# Altium PCB DoubleBar.PcbDoc
Units mil, origin at the board's own origin, x right, y up, seen from the top; angles counter-clockwise.
Board outline 2125.98 x 1181.1 mil, 2 copper layers (Top Layer, Bottom Layer); 60 components, 43 nets, 258 pads, 23 vias.
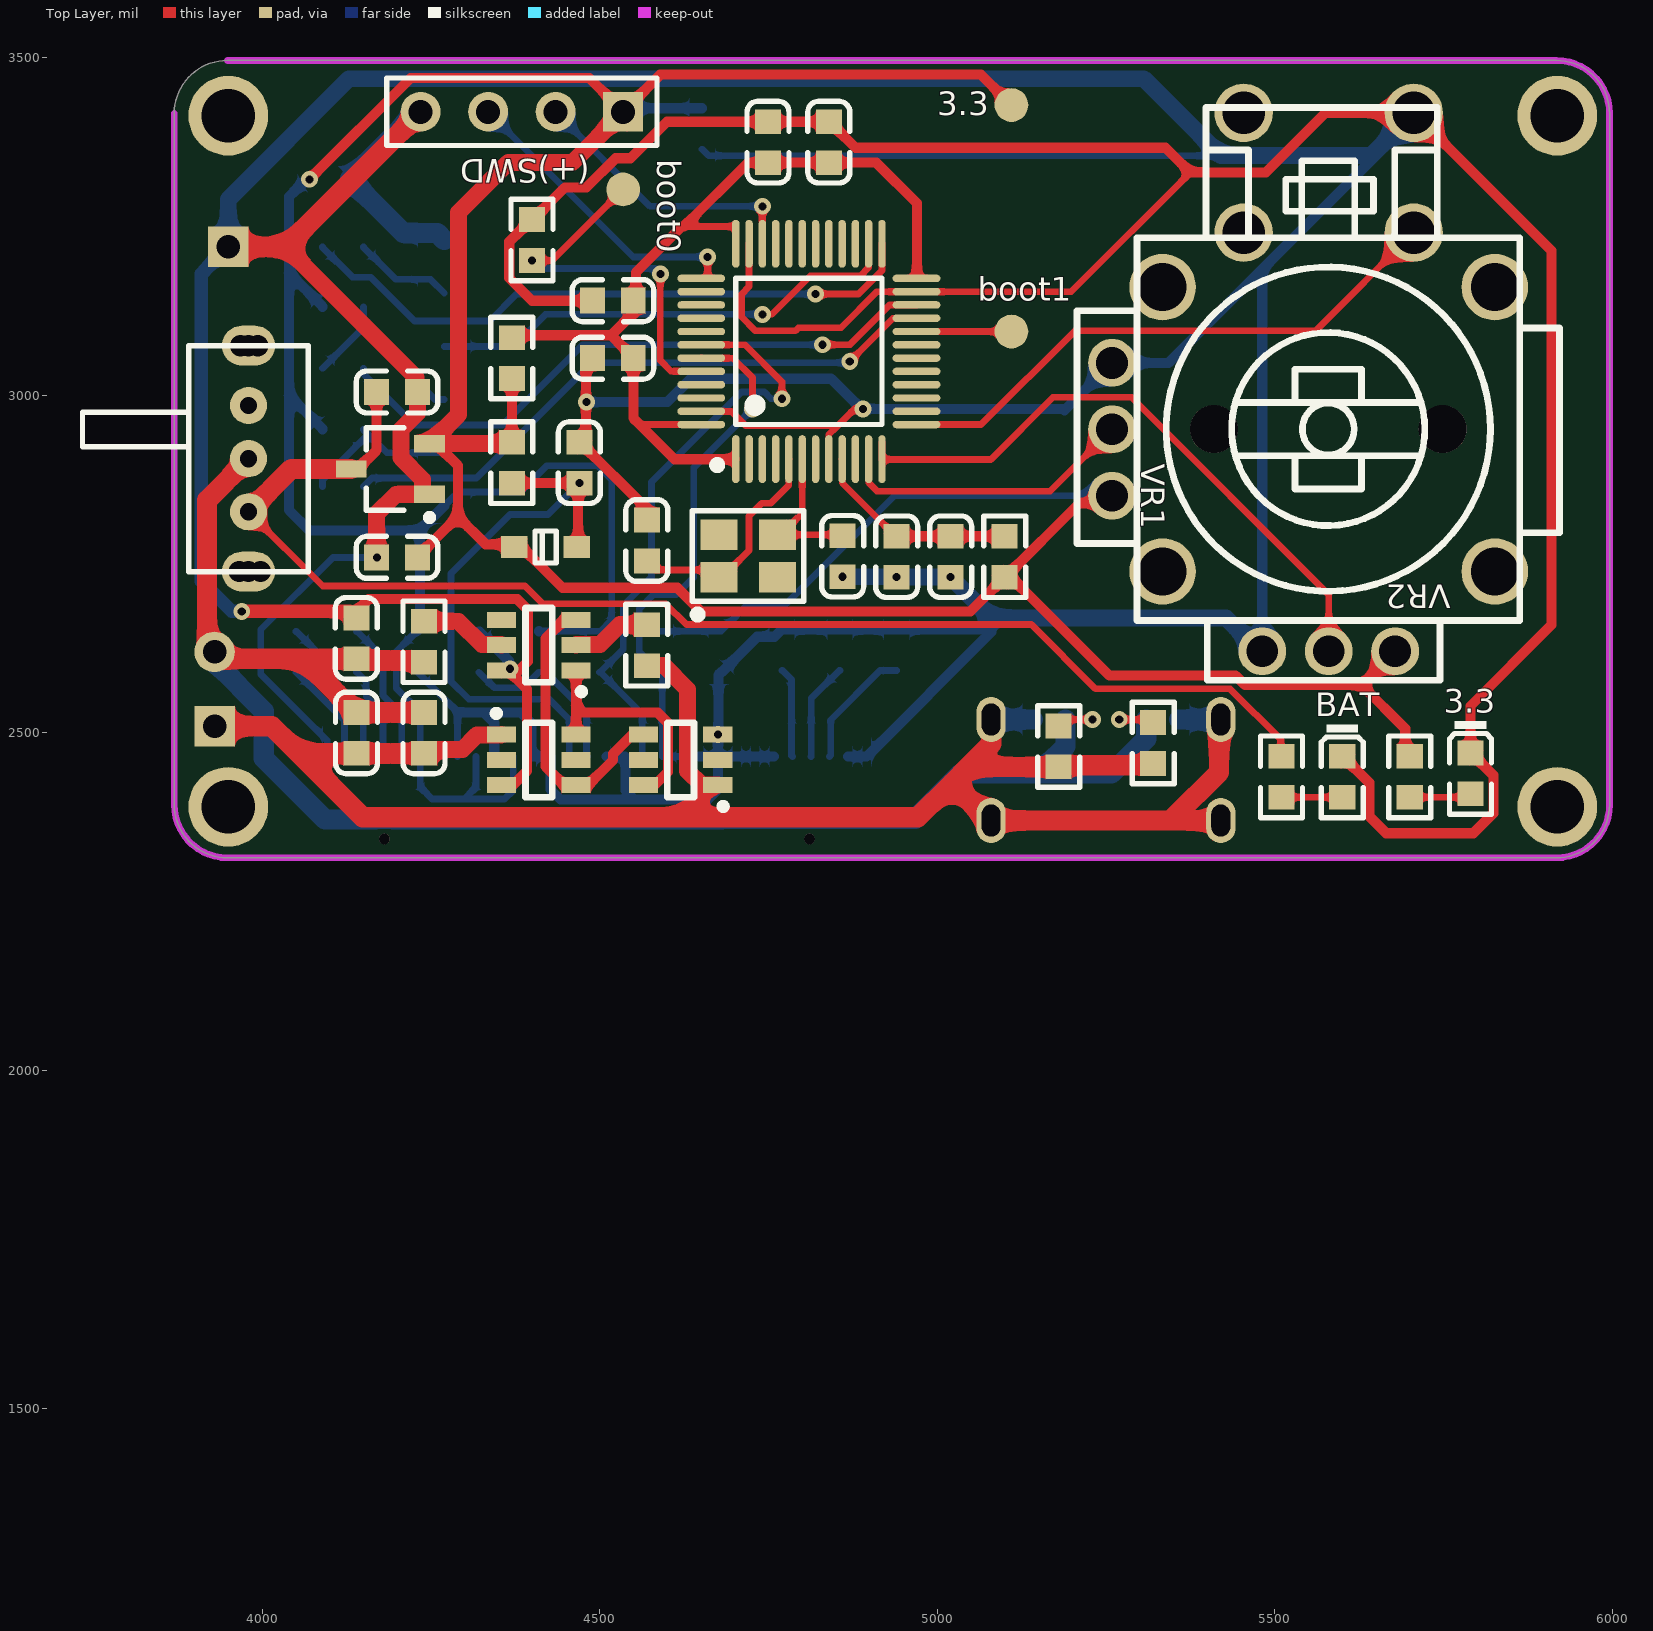
[diagram p0: Top Layer view]
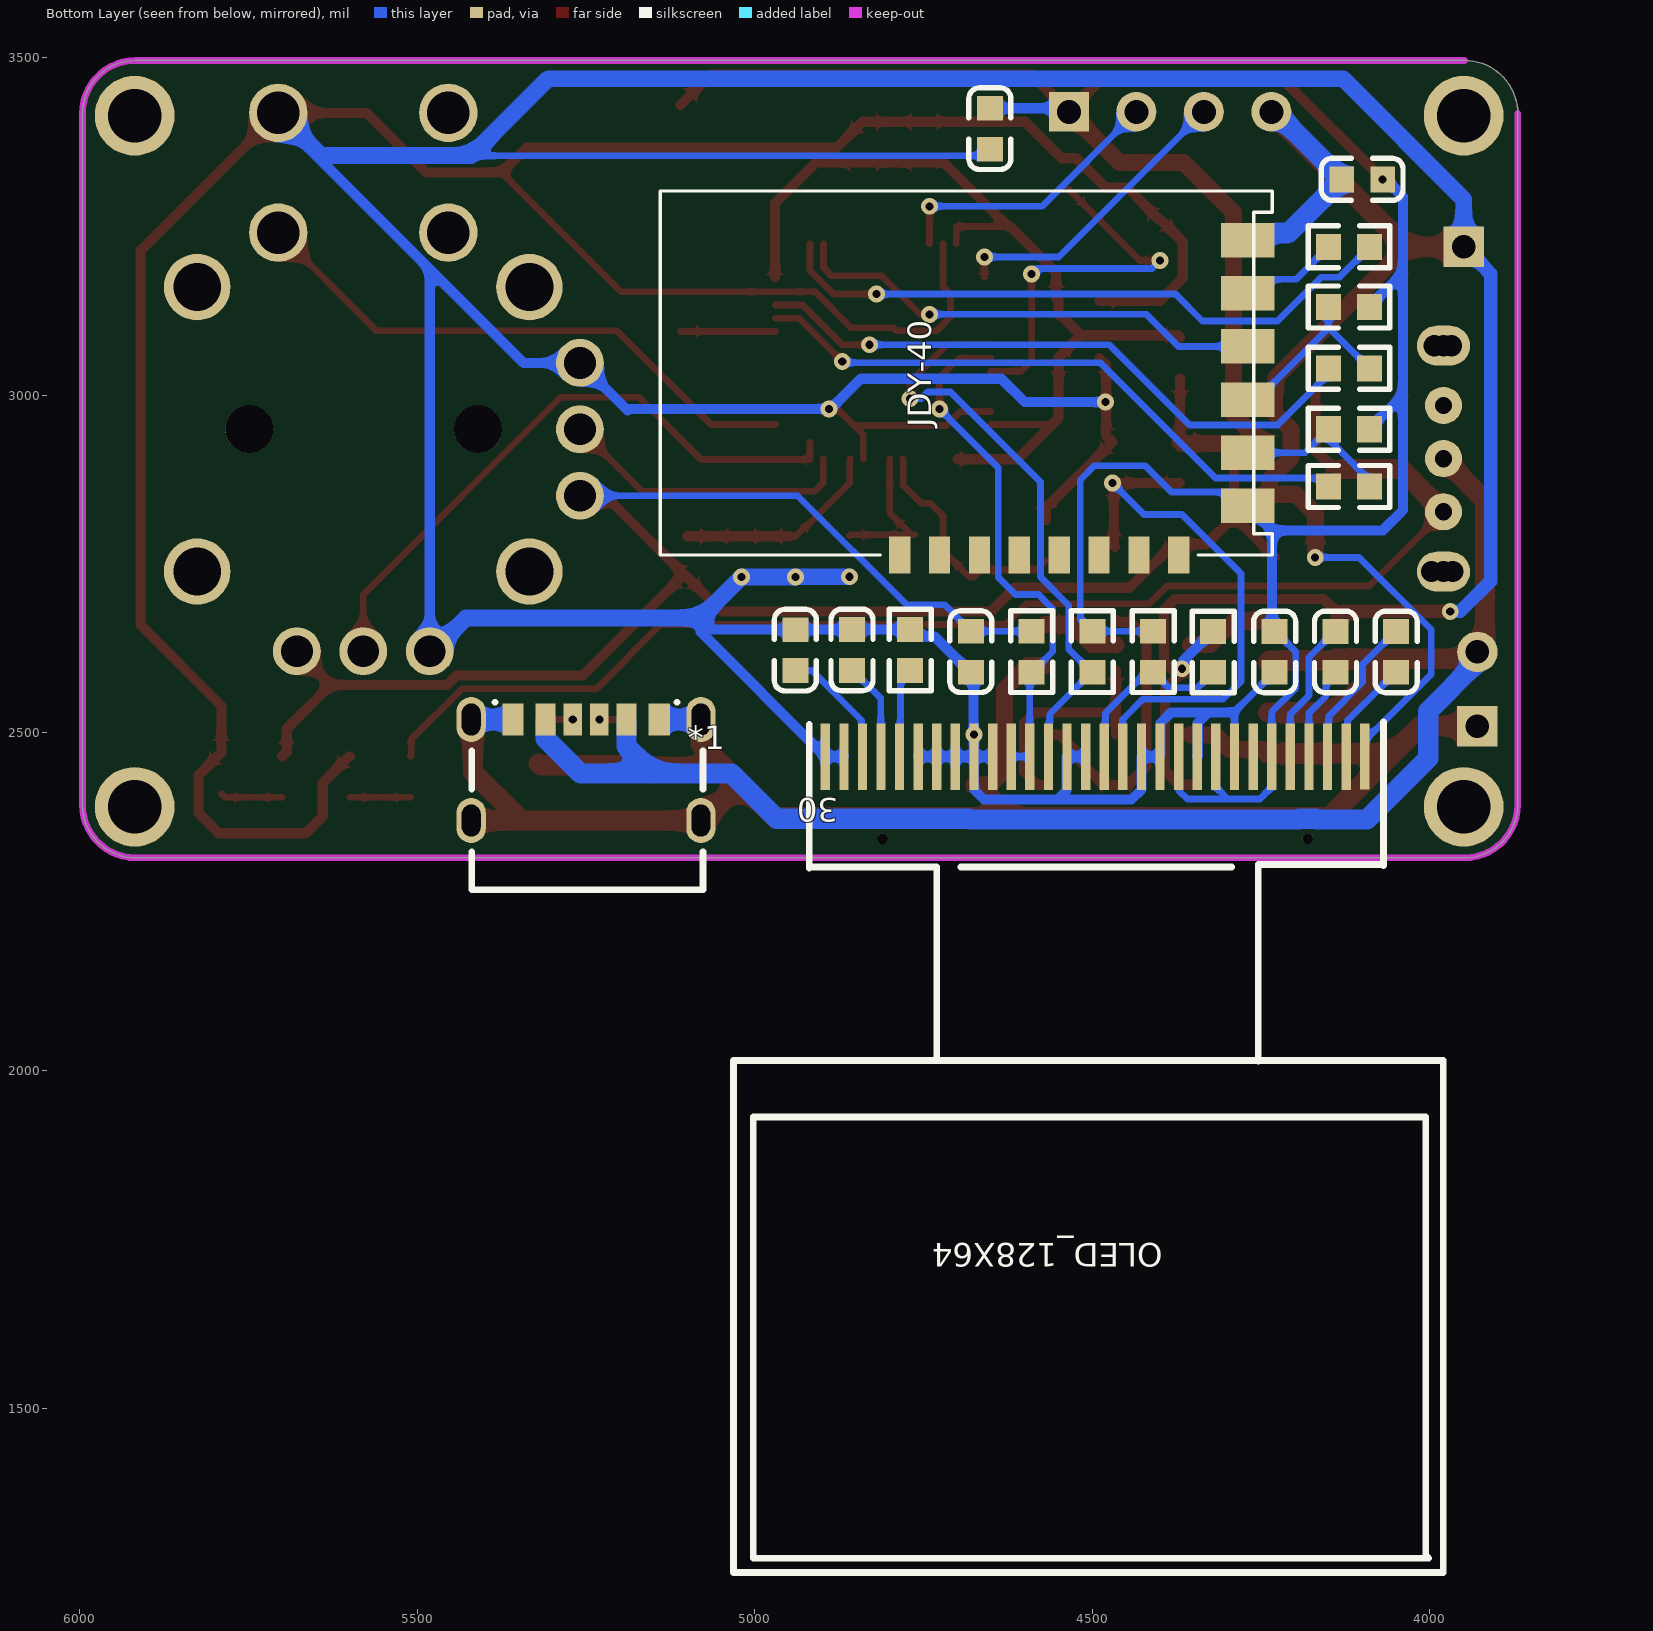
[diagram p1: Bottom Layer view, seen from below]
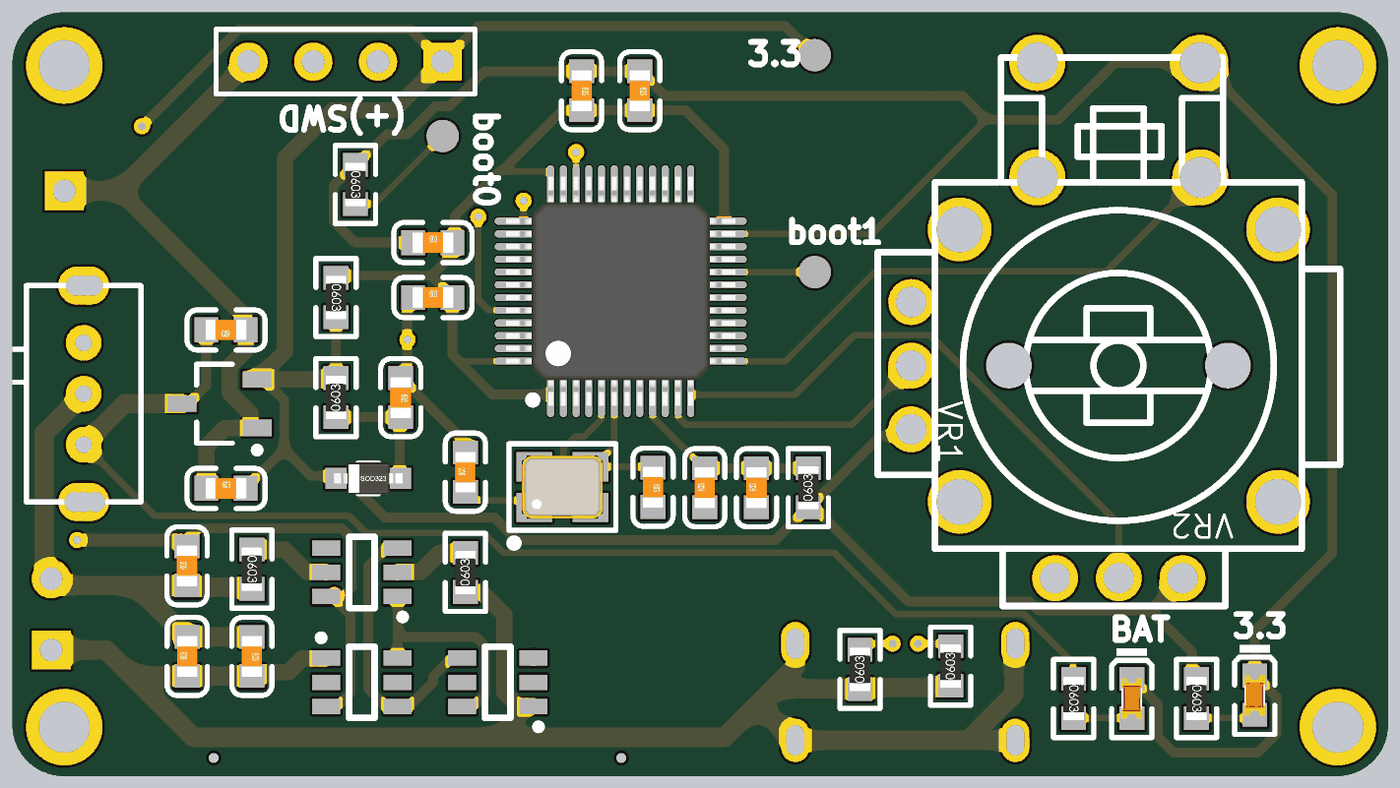
[diagram p2: 3D render of the assembled board from above, using the file's embedded part models]
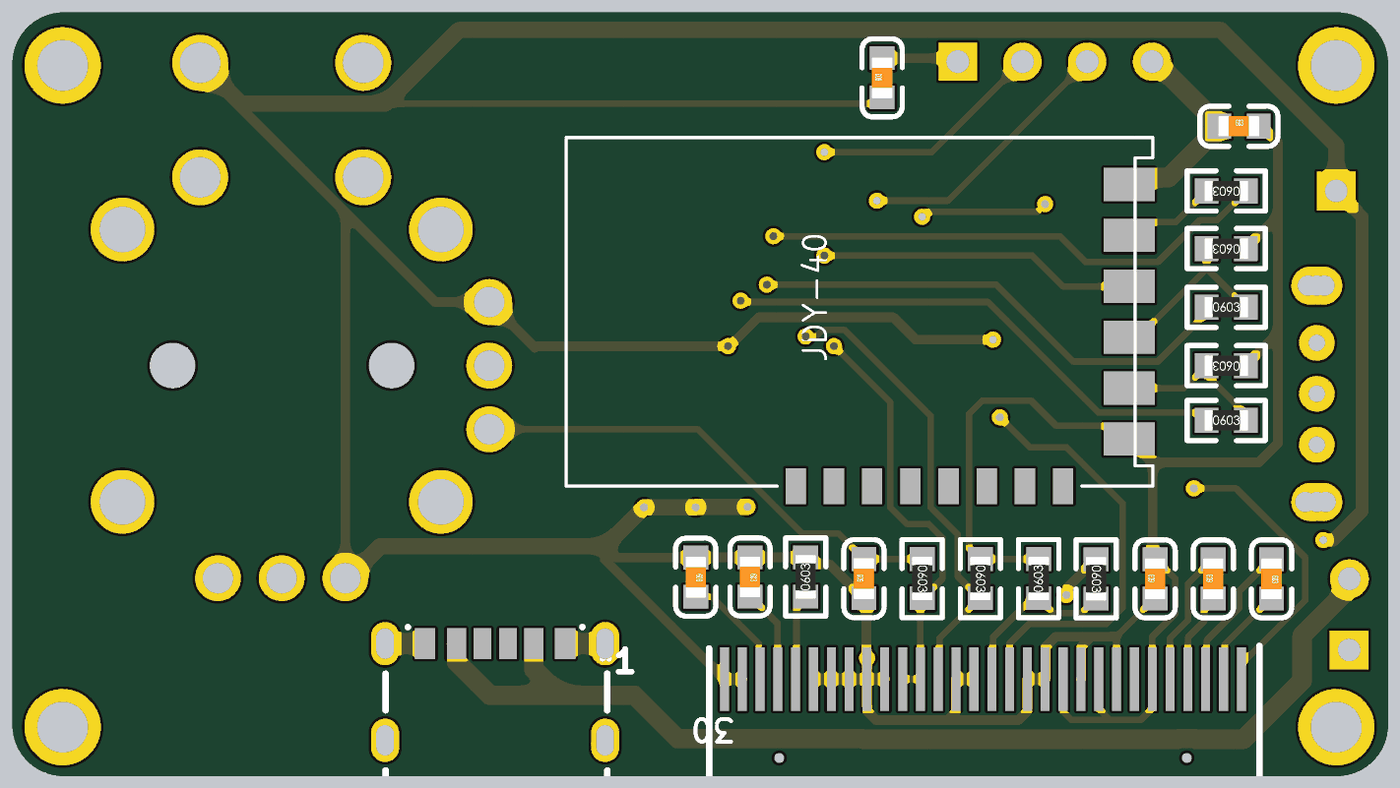
[diagram p3: 3D render of the assembled board from below, using the file's embedded part models]

## Layer stack, top to bottom
Top Solder: solder mask 0.4, Solder Resist, Dk 3.5
Top Layer: signal copper 1.4
Dielectric 1: dielectric 12.6, FR-4, Dk 4.8
Bottom Layer: signal copper 1.4
Bottom Solder: solder mask 0.4, Solder Resist, Dk 3.5

## Board outline
3870,2393.74 3870,3417.36 cw(c3948.74,3417.36) 3948.74,3496.1 5917.24,3496.1 cw(c5917.24,3417.36) 5995.98,3417.36 5995.98,2393.74 cw(c5917.24,2393.74) 5917.24,2315 3948.74,2315 cw(c3948.74,2393.74)

## Design rules (kind name [scope] priority, off if disabled: settings)
Clearance [All] p1: gap=7 ignorepadtopadclearanceinfootprint=FALSE
MinimumSolderMaskSliver [All] p1: minsoldermaskwidth=0
PolygonConnect [All] p1: connectstyle=Relief reliefconductorwidth=10 reliefentries=4 polygonreliefangle="90 Angle" airgapwidth=10
RoutingVias [All] p1: holewidth=12 width=25 viastyle="Through Hole" minholewidth=12 minwidth=25 maxholewidth=25 maxwidth=50
SilkToSilkClearance [All] p1: silktosilkclearance=0
SilkToSolderMaskClearance [IsPad] p1: minsilkscreentomaskgap=0 clearancetoexposedcopper=TRUE
SolderMaskExpansion [All] p1: expansion=4
Width [All] p1: maxlimit=100 minlimit=7 preferedwidth=10
27 further rules are at their usual default settings.

## Classes and differential pairs
component class DIY_Watch_Hardware: *1

## Components (designator, comment, footprint, x,y, rotation, side; value= is the part's Value field where it differs from the comment)
3.3 "TestPoint" TestPoint 5110,3430 r180 top (schematic designator TP4)
3.3 "红灯 0603" LC-0603_LED_S1 5790,2440 r270 top (schematic designator D2)
(+)SWD "Header 4" HDR1X4 4534.88,3420 r180 top (schematic designator SWD)
*1 "OLED_30Pin" OLED_0.96-30P-P0.70-12864 4495.98,2464.99 r0 bottom
BAT "红灯 0603" LC-0603_LED_S1 5600,2435 r270 top (schematic designator D3)
boot0 "TestPoint" TestPoint 4534.88,3305 r90 top (schematic designator TP1)
boot1 "TestPoint" TestPoint 5110,3094.53 r90 top (schematic designator TP7)
C2 "1uF/0603/50V" LC-0603_C 4050,2620 r270 bottom
C3 "1uF/0603/50V" LC-0603_C 4140,2620 r90 bottom
C4 "22pF/0603/50V" LC-0603_C 4570,2785 r90 top
C5 "22pF/0603/50V" LC-0603_C 4860,2761.65 r270 top
C6 "100nF/0603/50V" LC-0603_C 4519.69,3055.16 r0 top
C7 "100nF/0603/50V" LC-0603_C 4749.53,3375 r270 top
C8 "100nF/0603/50V" LC-0603_C 4519.69,3140.16 r0 top
C9 "100nF/0603/50V" LC-0603_C 4839.53,3375 r270 top
C10 "2.2uF/0603/16V" LC-0603_C 4940,2622.6 r270 bottom
C11 "4.7uF/0603/16V" LC-0603_C 4856.06,2622.91 r270 bottom
C12 "100nF/0603/50V" LC-0603_C 5020,2760.98 r90 top
C13 "1uF/0603/50V" LC-0603_C 4940,2760.98 r90 top
C14 "100nF/0603/50V" LC-0603_C 4139.69,2640 r90 top
C15 "1uF/0603/50V" LC-0603_C 4200,3005 r180 top
C16 "1uF/0603/50V" LC-0603_C 4200,2760 r0 top
C17 "10uF/0603/10V" LC-0603_C 4470,2900.32 r270 top
C18 "1uF/0603/50V" LC-0603_C 4680,2620.32 r90 bottom
C19 "1uF/0603/50V" LC-0603_C 4230,2620 r90 bottom
C20 "100nF/0603/50V" LC-0603_C 4100.43,3320 r180 bottom
C21 "100nF/0603/50V" LC-0603_C 4240,2500 r270 top
C22 "1uF/0603/50V" LC-0603_C 4140,2500 r90 top
C23 "104" LC-0603_C 4651.81,3395 r90 bottom
CiZhu1 "600R/0603/5%" 0603_R 5100,2760.98 r90 top value=?
D1 "1N4148WS T4" LC-SOD-323 4420,2775.32 r0 top
R1 "5.1kΩ/0603/1%" LC-0603_R 5320,2485 r90 top
R2 "10KΩ/0603/1%" LC-0603_R 4400,3230 r270 top
R3 "4.7KΩ/0603/1%" LC-0603_R 4410,2620.31 r90 bottom
R4 "4.7KΩ/0603/1%" LC-0603_R 4321.1,2620 r270 bottom
R5 "4.7KΩ/0603/1%" LC-0603_R 4500,2620.32 r270 bottom
R6 "4.7KΩ/0603/1%" LC-0603_R 4590,2620.32 r270 bottom
R7 "0Ω/0603/1%" LC-0603_R 4370,3055.16 r270 top
R8 "1KΩ/0603/1%" LC-0603_R 4570,2630 r90 top
R9 "100Ω/0603/1%" LC-0603_R 4240,2635 r270 top
R10 "5.1kΩ/0603/1%" LC-0603_R 5180,2480 r90 top
R11 "4.7KΩ/0603/1%" LC-0603_R 4120,2949.74 r0 bottom
R13 "4.7KΩ/0603/1%" LC-0603_R 4120,3130.87 r0 bottom
R14 "4.7KΩ/0603/1%" LC-0603_R 4370,2900.32 r90 top
R15 "100Ω/0603/1%" LC-0603_R 4120,2865 r180 bottom
R16 "100Ω/0603/1%" LC-0603_R 4120,3040 r180 bottom
R17 "100Ω/0603/1%" LC-0603_R 4120,3220 r0 bottom
R18 "1MΩ/0603/1%" LC-0603_R 4770,2622.91 r90 bottom
R19 "1KΩ/0603/1%" LC-0603_R 5700,2435 r270 top
R20 "1KΩ/0603/1%" LC-0603_R 5510,2435 r270 top
S "SW-SPDT" 8.5*3.5_3P 3981.97,2906.26 r270 top
SW1 "RKJXV1224005" RKJXV1224005 5579.94,2949.74 r180 top
U1 "STM32F103C8T6" LQFP-48_7x7x05P 4810,3065 r0 top
U2 "DW01KA" SOT-23-6 4410,2630 r0 top
U3 "SC8205C" SOT-23-6 4410,2460 r180 top
U4 "SC8205C" SOT-23-6 4620,2460 r0 top
U5 "SC662K-3.3V" SOT-23-3L 4190,2890.98 r0 top
USB1 "TYPE-C 6P" TYPE-C-SMD_TYPE-C-6P 5250,2445 r180 bottom
X1 "无源贴片晶振" SMD-3225_4P 4720,2761.97 r0 top
Y1 "JDY-40_1" "JDY-401 -No via" 4785.42,2763.43 r90 bottom

## Footprints (in the part's own frame and the unit in brackets; to place one, negate y for a bottom-side part, rotate by r counter-clockwise, add the part's x,y. Pads: shape width x height; smd on the part's side, far side on the other; paste and mask are expansions set on the pad)
8.5*3.5_3P [mm]
  round 1.4 hole 0.65: 1(2,-0.05) 2(0,-0.05) 3(-2,-0.05)
  oval 1.5x2 hole 0.8: 4(-4.25,-0.05) 5(4.25,-0.05)
  round 0.8 hole 0.8: 18(-4.25,0.3) 19(-4.25,-0.35) 20(4.25,0.4) 21(4.25,-0.4)
  silkscreen extent -4.25,-6.3 4.25,2.2
0603_R [mm]
  rect 0.93x0.98 smd: 1(-0.77,0) 2(0.77,0)
  silkscreen extent -1.53,-0.79 1.54,0.79, body extent -0.85,-0.4 0.85,0.4, height 0.56
HDR1X4 [mm] "Connector; Header; 4 Position"
  rect 1.5x1.5 hole 0.9: 1(0,0)
  round 1.5 hole 0.9: 2(2.54,0) 3(5.08,0) 4(7.62,0)
  silkscreen extent -1.27,-1.27 8.89,1.27
"JDY-401 -No via" [mm] "串口透传"
  rect 1.4x0.8 smd: 1(0,0) 2(0,-1.5) 3(0,-3) 4(0,-4.5) 5(0,-6) 6(0,-7.5) 7(0,-9) 8(0,-10.5)
  rect 1.3x2 smd: 9(1.85,-13.092) 10(3.85,-13.092) 11(5.85,-13.092) 12(7.85,-13.092) 13(9.85,-13.092) 14(11.85,-13.092)
  silkscreen extent 0,-14.02 13.7,9.01
LC-0603_C [mm]
  rect 0.93x0.98 smd: 1(-0.77,0) 2(0.77,0)
  silkscreen extent -1.53,-0.79 1.54,0.79, body extent -0.8,-0.4 0.8,0.4, height 0.3
LC-0603_LED_S1 [mm]
  rect 0.93x0.98 smd: A(0.77,0) K(-0.77,0)
  silkscreen extent -1.98,-0.79 1.54,0.79, body extent -0.8,-0.4 0.8,0.4, height 0.6
LC-0603_R [mm]
  rect 0.93x0.98 smd: 1(-0.77,0) 2(0.77,0)
  silkscreen extent -1.53,-0.79 1.54,0.79, body extent -0.85,-0.4 0.85,0.4, height 0.56
LC-SOD-323 [mm]
  rect 1x0.83 smd: 1(1.18,0) 2(-1.18,0)
  silkscreen extent -0.4,-0.6 0.4,0.6, body extent -1.35,-0.62 1.35,0.62, height 1.1
LQFP-48_7x7x05P [mm]
  oval 0.28x1.8 smd mask+0.051: 1(-2.75,-4.05) 2(-2.25,-4.05) 3(-1.75,-4.05) 4(-1.25,-4.05) 5(-0.75,-4.05) 6(-0.25,-4.05) 7(0.25,-4.05) 8(0.75,-4.05) 9(1.25,-4.05) 10(1.75,-4.05) 11(2.25,-4.05) 12(2.75,-4.05) 25(2.75,4.05) 26(2.25,4.05) 27(1.75,4.05) 28(1.25,4.05) 29(0.75,4.05) 30(0.25,4.05) 31(-0.25,4.05) 32(-0.75,4.05) 33(-1.25,4.05) 34(-1.75,4.05) 35(-2.25,4.05) 36(-2.75,4.05)
  oval 1.8x0.28 smd mask+0.051: 13(4.05,-2.75) 14(4.05,-2.25) 15(4.05,-1.75) 16(4.05,-1.25) 17(4.05,-0.75) 18(4.05,-0.25) 19(4.05,0.25) 20(4.05,0.75) 21(4.05,1.25) 22(4.05,1.75) 23(4.05,2.25) 24(4.05,2.75) 37(-4.05,2.75) 38(-4.05,2.25) 39(-4.05,1.75) 40(-4.05,1.25) 41(-4.05,0.75) 42(-4.05,0.25) 43(-4.05,-0.25) 44(-4.05,-0.75) 45(-4.05,-1.25) 46(-4.05,-1.75) 47(-4.05,-2.25) 48(-4.05,-2.75)
  silkscreen extent -3.6,-4.42 2.75,2.75, body extent -4.5,-4.5 4.5,4.5, height 1.6
OLED_0.96-30P-P0.70-12864 [mm]
  rect 0.351x2.499 smd: 1(-10.149,-0.002) 2(-9.444,0) 3(-8.744,0) 4(-8.044,0) 5(-7.344,0) 6(-6.644,0) 7(-5.944,0) 8(-5.244,0) 9(-4.544,0) 10(-3.844,0) 11(-3.144,0) 12(-2.444,0) 13(-1.744,0) 14(-1.044,0) 15(-0.344,0) 16(0.356,0) 17(1.056,0) 18(1.756,0) 19(2.456,0) 20(3.156,0) 21(3.856,0) 22(4.556,0) 23(5.256,0) 24(5.956,0) 25(6.656,0) 26(7.356,0) 27(8.056,0) 28(8.751,0.001) 29(9.45,0.002) 30(10.149,0.002)
  round 0.4 hole 0.4 unplated: ""(-8,3.1) ""(8,3.1)
  silkscreen extent -13.1,-1.3 13.6,30.7
RKJXV1224005 [mm]
  round 1.8 hole 1.2: 1(8.15,-2.5) 2(8.15,0) 3(8.15,2.5) 4(2.5,8.35) 5(0,8.35) 6(-2.5,8.35)
  round 2.5 hole 1.8: 7(-6.25,5.35) 8(-6.25,-5.35) 9(6.25,-5.35) 10(6.25,5.35)
  round 2.2 hole 1.6: a(-3.2,-7.4) b(-3.2,-11.9) c(3.2,-7.4) d(3.2,-11.9)
  round 1.8 hole 1.8 unplated: ""(-4.284,-0.006) ""(4.316,-0.006)
  silkscreen extent -8.68,-12.11 9.47,9.44
SMD-3225_4P [mm] "晶振"
  rect 1.4x1.15 smd: 1(-1.1,-0.8) 2(1.1,-0.8) 3(1.1,0.8) 4(-1.1,0.8)
  silkscreen extent -2.1,-2.35 2.1,1.7, body extent -1.6,-1.25 1.6,1.25, height 0.61
SOT-23-3L [mm] "http://www.aosmd.com/res/packaging_information/SOT-23-3L.pdf"
  rect 1.15x0.65 smd: 1(1.475,-0.95) 2(1.475,0.95) 3(-1.475,0)
  silkscreen extent -0.9,-1.95 1.6,1.55, body extent -0.9,-1.55 0.9,1.55, height 1.25
SOT-23-6 [mm]
  rect 1.1x0.6 smd: 1(1.4,-0.95) 2(1.4,0) 3(1.4,0.95) 4(-1.4,0.95) 5(-1.4,0) 6(-1.4,-0.95)
  silkscreen extent -0.5,-1.87 1.73,1.4
TestPoint [mil]
  round 50 smd: 1(0,0)
TYPE-C-SMD_TYPE-C-6P [mm]
  oval 1.1x1.7 hole 0.7 slot 1.2 at 90 deg: 7(-4.32,-1.9) 7(-4.32,1.9) 7(4.32,-1.9) 7(4.32,1.9)
  rect 0.7x1.2 smd: A5(-0.5,1.9) B5(0.5,1.9)
  rect 0.76x1.2 smd: A9(1.52,1.9) B9(-1.52,1.9)
  rect 0.8x1.2 smd: A12(2.75,1.9) B12(-2.75,1.9)
  silkscreen extent -4.3,-4.5 4.4,2.55

## Part data
3.3 BAT: library part "0603 红灯", "发光二极管", Package=0603, SuppliersPartNumber=C2286, ComponentLink1Description=供?, ComponentLink1URL=http://www.szlcsc.com/product/details_2659.html, Supplier=LC
(+)SWD: "Header, 4-Pin", LatestRevisionDate=17-Jul-2002, LatestRevisionNote="Re-released for DXP Platform.", Publisher="Altium Limited"
C2 C3 C13 C15 C16 C18 C19 C22: library part "0603 1uF (105) 10% 50V", "贴片电容", Package=0603, SuppliersPartNumber=C15849, ComponentLink1Description=供?, ComponentLink1URL=http://www.szlcsc.com/product/details_16531.html, Supplier=LC
C4 C5: library part "0603 22pF (220) 5% 50V", "贴片电容", Package=0603, SuppliersPartNumber=C1653, ComponentLink1Description=供?, ComponentLink1URL=http://www.szlcsc.com/product/details_2005.html, Supplier=LC
C6 C7 C8 C9 C12 C14 C20 C21: library part "0603 100nF (104) 10% 50V", "贴片电容", Package=0603, SuppliersPartNumber=C14663, ComponentLink1Description=供?, ComponentLink1URL=http://www.szlcsc.com/product/details_15331.html, Supplier=LC
C10: library part "0603 2.2uF (225) 10% 16V", "贴片电容", Package=0603, SuppliersPartNumber=C23630, ComponentLink1Description=供?, ComponentLink1URL=http://www.szlcsc.com/product/details_24366.html, Supplier=LC
C11: library part "0603 4.7uF (475) 10% 16V", "贴片电容", Package=0603, SuppliersPartNumber=C19666, ComponentLink1Description=供?, ComponentLink1URL=http://www.szlcsc.com/product/details_20375.html, Supplier=LC
C17: library part "0603 10uF (106) 10% 10V", "贴片电容", Package=0603, SuppliersPartNumber=C19702, ComponentLink1Description=供?, ComponentLink1URL=http://www.szlcsc.com/product/details_20411.html, Supplier=LC
C23: library part "Cap Chip 0603", "Polarized Capacitor (Radial)", Published=8-Jun-2000, Publisher="Altium Limited", Revision="July-2002: Re-released for DXP Platform."
CiZhu1: library part Cizhu, "电阻_磁珠"
D1: library part "SOD-323 1N4148WS T4", "二极管", Package=SOD-323, SuppliersPartNumber=C2128, ComponentLink1Description=供?, ComponentLink1URL=http://www.szlcsc.com/product/details_2485.html, Supplier=LC
R1 R9 R10 R15 R16 R17: library part "0603 100Ω (1000) 1%", "贴片电阻", Package=0603, SuppliersPartNumber=C22775, ComponentLink1Description=供?, ComponentLink1URL=http://www.szlcsc.com/product/details_23502.html, Supplier=LC
R2: library part "0603 10KΩ (1002) 1%", "贴片电阻", Package=0603, SuppliersPartNumber=C25804, ComponentLink1Description=供?, ComponentLink1URL=http://www.szlcsc.com/product/details_26547.html, Supplier=LC
R3 R4 R5 R6 R11 R13 R14: library part "0603 4.7KΩ (4701) 1%", "贴片电阻", Package=0603, SuppliersPartNumber=C23162, ComponentLink1Description=供?, ComponentLink1URL=http://www.szlcsc.com/product/details_23889.html, Supplier=LC
R7: library part "0603 0Ω (0R0) 1%", "贴片电阻", Package=0603, SuppliersPartNumber=C21189, ComponentLink1Description=供?, ComponentLink1URL=http://www.szlcsc.com/product/details_21903.html, Supplier=LC
R8 R19 R20: library part "0603 1KΩ (1001) 1%", "贴片电阻", Package=0603, SuppliersPartNumber=C21190, ComponentLink1Description=供?, ComponentLink1URL=http://www.szlcsc.com/product/details_21904.html, Supplier=LC
R18: library part "0603 1MΩ (1004) 1%", "贴片电阻", Package=0603, SuppliersPartNumber=C22935, ComponentLink1Description=供?, ComponentLink1URL=http://www.szlcsc.com/product/details_23662.html, Supplier=LC
S: "SPDT Subminiature Toggle Switch, Right Angle Mounting, Vertical Actuation", Datasheet="Latest Revision: 05-Dec-2000", Published=24-Mar-1999, Publisher="Altium Limited", Revision 1="Jul-2002: Re-released for DXP Platform.", Revision 2="17-Dec-2003: Schematic revised, PCB Footprint replaced."
SW1: BOM_JLCPCB Part Class="Extended Part", BOM_Manufacturer="ALPS Electric", BOM_Manufacturer Part=RKJXV1224005, BOM_Supplier=LCSC, BOM_Supplier Part=C146170, Contributor=LCSC, spicePre=S, spiceSymbolName=RKJXV1224005
U1: "ARM", Package=LQFP-48_7x7x05P, SuppliersPartNumber=C8734, ComponentLink1Description=供?, ComponentLink1URL=http://www.szlcsc.com/product/details_9243.html, Supplier=LC
U2: "锂电池保护芯片"
U3 U4: "二合一MOS"
U5: "LDO"
USB1: BOM_JLCPCB Part Class="Extended Part", BOM_Manufacturer="SHOU HAN", BOM_Manufacturer Part="TYPE-C 6P", BOM_Supplier=LCSC, BOM_Supplier Part=C456012, Contributor=LCSC, spicePre=U, spiceSymbolName="TYPE-C 6P"
X1: library part XTAL_4, "25M/3225"
Y1: "串口透传无过孔"

## Free pads (board coordinates)
  round 60 hole 35: 4(3929.68,2620)
  rect 60x60 hole 35: 5(3930,2510) 6(3950,3220)
  round 118.11 hole 78.74: 7(3950,2390.55) 7(3950,3414.17) 7(5918.5,2390.55) 7(5918.5,3414.17)

## Via types
v1: diameter 25, hole 12, Top Layer to Bottom Layer, 23 vias

## Nets (pads, with @x,y where several pads share a name; then routed paths per layer and width w, separated by ;. In a path a pad name is that pad's centre, name@x,y a point inside that pad or via, vN(x,y) a via of type N, cw(c..) or ccw(c..) an arc to the next point about the centre after c; other vN are vias at no path point)
3V3: 3.3.1 (+)SWD.1 *1.6 *1.9 *1.11 C16.2 C18.2 C19.2 C20.2 C23.2 CiZhu1.1 D1.2 R3.2 R5.1 R6.1 R7.2 R11.1 R13.1 R14.2 R19.1 SW1.3 SW1.6 U5.2 Y1.9 | length 7207.6
  Top Layer w15: v1(4070.11,3320) 4220.11,3470 4484.88,3470 4534.88,3420 4589.88,3475 5065,3475 3.3.1 ; C16.2 4230.31,2760.98 4290,2820.67 ; U5.2@4257.91,2928.39 4290,2896.3 4290,2820.67 ; R14.2 R7.2 ; SW1.3 5248.38,2840.63 5210.95,2840.63 CiZhu1.1@5100.98,2730.67 ; SW1.6 5628.43,2571.07 ; R19.1 5693.38,2471.94 5693.38,2506.12 5628.43,2571.07 ; 4290,2820.67 4331.36,2779.31 4369.55,2779.31 D1.2 4384.69,2775.32 4445,2715 4615,2715 4650,2680 5049.33,2680 CiZhu1.1 CiZhu1.1@5100.98,2730.67 ; CiZhu1.1@5100.98,2730.67 5109.33,2730.67 5255.23,2584.77 5442.1,2584.77 5455.79,2571.07 5628.43,2571.07
  Top Layer w25: U5.2 4257.91,2928.39 U5.2@4258.21,2928.68 ; R14.2 4368.05,2928.68 U5.2@4258.21,2928.68 ; 4534.88,3420 4459.57,3344.68 4364.69,3344.68 4290.98,3270.98 4290.98,2971.3 4258.21,2938.52 U5.2@4258.21,2928.68
  Bottom Layer w10: C19.2@4229.02,2650.32 4198.71,2620.01 4198.71,2566.41 4234.41,2530.71 *1.6 4234.41,2419.49 4251.9,2402 4299.59,2402 ; Y1.9 4290.59,2856.85 4382.94,2856.85 4421.94,2895.86 4497.03,2895.86 4517.89,2875 4517.89,2667.54 4500.98,2650.63 R5.1 R3.2 ; *1.9 4317.08,2419.49 4299.59,2402 ; *1.11 4372.2,2414.93 4359.27,2402 4299.59,2402 ; R6.1 C18.2 4719.37,2690 4775.55,2690 4936.87,2851.32 SW1.3
  Bottom Layer w15: v1(4070.11,3320) 4065.43,3320 4040,3294.57 4040,3181.54 ; R11.1 4089.69,2950.73 4040,3000.41 ; R13.1 4089.69,3131.85 4040,3181.54 ; C19.2@4229.02,2650.32 4233.74,2655.04 4233.74,2800 ; Y1.9 4233.74,2800 ; 4534.88,3420 4540.2,3425.32 C23.2 ; 4040,3000.41 4040,2830 4070,2800 4233.74,2800 ; 4040,3000.41 4040,3181.54
BAT: C14.1 C21.1 C22.2 pad.4 R9.2 S.2 USB1.A9 USB1.B9 | length 2556.1
  Top Layer w30: S.2@3976.26,2910 3976.26,2902.52 3918.63,2844.89 3918.63,2631.05 pad.4 3937.8,2620 3948.12,2609.68 4059.65,2609.68 ; C21.1 C22.2 4139.02,2530.32 4059.65,2609.68 ; R9.2 4237.5,2607.18 4142.19,2607.18 C14.1 4059.65,2609.68
  Bottom Layer w30: pad.4 3929.68,2605.32 4002.71,2532.29 4002.71,2462.29 4093.2,2371.8 4167.63,2371.8 4168.65,2372.81 4193.39,2372.81 4194.41,2371.8 4681.27,2371.8 4682.28,2372.81 4967.81,2372.81 5035,2440 5150,2440 ; USB1.A9 5190.12,2519.77 5190.12,2480.12 5150,2440 ; USB1.B9 USB1.B9 5309.8,2491.41 5258.39,2440 5150,2440
BAT+: C15.2 R20.1 S.1 U5.3 | length 2008.3
  Top Layer w10: S.1 4089.9,2717.62 4389.6,2717.62 4416.01,2691.21 4597.84,2691.21 4628.56,2660.5 5139.5,2660.5 5234.73,2565.27 5434.02,2565.27 5509.02,2490.27 5509.02,2465.31 R20.1
  Top Layer w15: U5.3 4141.77,2890.98 4169.69,2918.9 C15.2
  Top Layer w30: S.1 4043.46,2890.98 U5.3
BOOT0: boot0.1 R2.2 U1.44 | length 572.3
  Top Layer w10: v1(4400,3199.68) 4429.57,3199.68 boot0.1 ; v1(4590,3180) 4590,3051.53 4605.86,3035.67 4650.36,3035.67 U1.44
  Bottom Layer w10: v1(4400,3199.68) 4411.68,3188 4582,3188 v1(4590,3180)
BOOT1: boot1.1 U1.20 | length 140.6
  Top Layer w10: U1.20 boot1.1
CS: R17.1 U1.25 | length 945.2
  Top Layer w10: v1(4820,3150) 4883.39,3150 4918.27,3184.88 U1.25
  Bottom Layer w10: R17.1 4089.69,3219.02 4133.7,3175 4160.75,3175 4225.68,3110.07 4337.25,3110.07 4377.18,3150 v1(4820,3150)
GND: 3.3.K (+)SWD.4 *1.1 *1.8 *1.10 *1.12 *1.13 *1.16 *1.17 *1.21 *1.22 *1.23 *1.24 *1.25 *1.29 *1.30 BAT.K C4.2 C5.2 C6.1 C7.1 C8.1 C9.1 C10.1 C11.1 C12.1 C13.1 C14.2 C15.1 C16.1 C17.1 C18.1 C19.1 C20.1 C23.1 pad.6 R2.1 R4.1 R18.2 SW1.1 SW1.4 SW1.b U1.8 U1.23 U1.35 U1.47 U2.6 U3.3 U4.3 U5.1 Y1.14 | length 15123.5
  Top Layer w10: U1.47 4650.75,2976.22 4695.49,2976.22 4716.21,2955.5 4846.8,2955.5 4850,2952.3 ; U1.35 4721.42,3161.06 4710,3149.64 4710,3116.45 4730.95,3095.5 4789.9,3095.5 4794.51,3100.12 4857.55,3100.12 4911.01,3153.58 U1.23 5198.58,3153.58 5375,3330 ; U1.8 4839.33,2905.75 4839.33,2941.63 4850,2952.3 ; v1(4890,2980) 4877.7,2980 4850,2952.3
  Top Layer w15: C14.2@4130,2680 C14.2 4139.69,2680.33 4157.47,2698.12 4378.13,2698.12 4393.7,2682.56 4393.7,2605.7 4380.6,2592.6 ; U3.3 4355.57,2423.29 4372.14,2423.29 4392.22,2443.37 4392.22,2565.1 U2.6@4364.79,2592.53 ; C6.1 4479.69,3045.47 4479.69,2940.32 C17.1 4470.98,2930.63 4569.02,2832.6 4569.02,2815.32 C4.2 ; C8.1 4399.84,3140.16 4366.21,3173.79 4366.21,3227.51 4399.02,3260.31 R2.1 4400.98,3260.31 4448.57,3307.9 4480.41,3307.9 4523.71,3351.21 4545.65,3351.21 4599.76,3405.32 C7.1 C9.1 4840.51,3405.32 4879.07,3366.76 5338.24,3366.76 5375,3330 5486.65,3330 5574.89,3418.25 SW1.b 5910,3214.17 5910,2660 5790,2540 3.3.K 5790.98,2470.31 5823.79,2437.51 5823.79,2380.89 5794.23,2351.33 5665,2351.33 5640,2376.33 5640,2426.3 5600.98,2465.31 BAT.K
  Top Layer w20: v1(3970,2680) C14.2@4130,2680
  Top Layer w25: 4034.88,3220 4228.21,3026.67 4228.21,3007.11 C15.1 4230.31,2973.64 4205.93,2949.26 4205.93,2907.51 4237.93,2875.51 4237.93,2853.88 4238.23,2853.58 U5.1 4247.78,2853.29 4198.4,2853.29 4169.69,2824.57 C16.1
  Top Layer w30: pad.6 4034.88,3220 4234.88,3420
  Bottom Layer w10: *1.1 4096.41,2488.71 3997.92,2587.19 3997.92,2652.81 4105.12,2760 v1(4170,2760) ; C19.1 4230.98,2589.68 4289.52,2531.15 *1.8 ; C23.1 4661.49,3355 5420,3355
  Bottom Layer w15: 4289.52,2531.15 4297.49,2531.15 4298.14,2530.5 4328.19,2530.5 ; R4.1 4322.08,2650.31 4365.35,2607.05 4365.35,2596.91 v1(4367.27,2595) ; *1.10 4344.04,2465.6 4344.04,2514.65 4328.19,2530.5 ; v1(4480.54,2990) 4600.41,2990 4634.91,3024.5 4842.96,3024.5 4887.46,2980 v1(4890,2980) 5185.91,2980 5188.41,2977.51 SW1.1 5342.79,3048.17 5481.51,3186.89 ; *1.16 *1.17 4538.16,2464.4 4538.16,2414.47 4551.34,2401.3 ; *1.21 *1.22 ; *1.25 *1.24 *1.23 *1.22 ; *1.29 *1.30 5080.27,2649.62 5080.27,2670.4 5062.78,2652.91 C10.1 4939.84,2653.07 4856.22,2653.07 C11.1 R18.2 4759.19,2642.42 4733.41,2642.42 4680.98,2590 C18.1 4675.95,2585.95 4675.95,2506.7 4675.35,2506.1 *1.22 ; SW1.4 5481.51,3186.89 ; SW1.b 5705.92,3411.3 5481.51,3186.89 ; 4328.19,2530.5 4383.31,2530.5 4399.16,2514.65 4399.16,2465.6 *1.12 *1.13 4427.32,2415.95 4441.97,2401.3 4551.34,2401.3 ; 4551.34,2401.3 4660.7,2401.3 4674.75,2415.35 4674.75,2423.3 4675.35,2423.9 *1.22
  Bottom Layer w20: pad.6 3910,3180 3910,2725 3955,2680 v1(3970,2680)
  Bottom Layer w25: pad.6 3950,3290 4129.03,3469.03 5305.97,3469.03 5420,3355 5642.67,3355 SW1.b ; v1(4860,2731.34) 4939.33,2731.34 v1(4940,2730.67) v1(5020,2730.67) 5080.27,2670.4 5427.76,2670.4 5477.16,2621 SW1.4
  Bottom Layer w30: 4234.88,3420 4229.76,3420 4130.74,3320.98 C20.1 4130.74,3319.02 4209.21,3240.55 4259.41,3240.55 Y1.14
  other v1: 4675.12,2497.4
Net*1_2: *1.2 C2.2 | length 156
  Bottom Layer w10: C2.2 4050.98,2589.68 4122.27,2518.4 4122.27,2466.9 *1.2
Net*1_3: *1.3 C2.1 | length 228.5
  Bottom Layer w10: C2.1 4050.98,2650.32 4100,2601.3 4100,2575 4149.83,2525.17 4149.83,2468.21 *1.3@4152.97,2465.07
Net*1_4: *1.4 C3.1 | length 141.5
  Bottom Layer w10: C3.1 4140.98,2589.68 4154.29,2576.38 4154.29,2554.34 4179.29,2529.34 *1.4
Net*1_5: *1.5 C3.2 | length 214
  Bottom Layer w10: C3.2 4140.98,2650.32 4179.29,2612.01 4179.29,2555.71 4206.85,2528.15 4206.85,2466.31 *1.5@4208.09,2465.07
Net*1_15: *1.15 R3.1 R4.2 | length 268.7
  Bottom Layer w10: R4.2 4343.78,2567 4387,2567 R3.1 4420,2590 4480.54,2529.46 4480.54,2466.9 *1.15
Net*1_26: *1.26 R18.1 | length 134.6
  Bottom Layer w10: R18.1 4770.98,2592.6 4784.29,2579.29 4784.29,2466.3 *1.26
Net*1_27: *1.27 C11.2 | length 145.9
  Bottom Layer w10: *1.27 4813.36,2465.21 4813.36,2550.89 4855.08,2592.6 C11.2
Net*1_28: *1.28 C10.2 | length 183
  Bottom Layer w10: *1.28 4842.41,2466.84 4842.41,2519.38 4915.31,2592.28 C10.2
NetC4_1: C4.1 U1.5 X1.1 | length 345.4
  Top Layer w10: C4.1 4583.31,2741.38 4665.79,2741.38 X1.1 4681.61,2730.47 4721.42,2770.28 4721.42,2821.42 4740,2840 4753.23,2840 4780.28,2867.05 4780.28,2905.36 U1.5
NetC5_1: C5.1 U1.6 X1.3 | length 222.6
  Top Layer w10: X1.3 X1.3@4768.23,2793.46 ; U1.6 4800.16,2825.39 X1.3@4768.23,2793.46 ; C5.1 4858.5,2793.46 X1.3@4768.23,2793.46
NetD2_A: 3.3.A R19.2 | length 92.1
  Top Layer w10: R19.2 5785,2404.68 3.3.A
NetD3_A: BAT.A R20.2 | length 90
  Top Layer w10: R20.2 BAT.A
NetR1_2: R1.2 USB1.A5 | length 52.2
  Top Layer w10: v1(5269.69,2519.8) 5315.51,2519.8 R1.2
NetR8_2: R8.2 U2.2 | length 117.4
  Top Layer w25: U2.2 4465.81,2630.69 4500.69,2630.69 4530.32,2660.32 R8.2
NetR9_1: R9.1 U2.5 | length 129.5
  Top Layer w25: R9.1 4290.98,2665.31 4325.61,2630.69 4354.19,2630.69 U2.5
NetR10_2: R10.2 USB1.B5 | length 54.2
  Top Layer w10: R10.2 5189.49,2519.8 v1(5230.31,2519.8)
NetR11_2: R11.2 R15.2 Y1.10 | length 249.6
  Bottom Layer w10: R15.2 4089.68,2874.68 4157.11,2942.11 4150.32,2948.9 R11.2 4185.06,2915 Y1.10
NetR13_2: R13.2 R16.2 Y1.11 | length 280.5
  Bottom Layer w10: R16.2 4150.32,3100.63 ; R13.2 4150.32,3100.63 ; Y1.11 4256.22,2993.74 4150.32,3099.65 4150.32,3100.63
NetR17_2: R17.2 Y1.13 | length 148.8
  Bottom Layer w10: R17.2 4150.32,3219.02 4163.62,3205.71 4164.61,3205.71 4198.5,3171.81 4249.41,3171.81 Y1.13
OC: U2.3 U3.4 U4.4 | length 439
  Top Layer w15: U2.3 4461.82,2664.1 4444.1,2664.1 4420,2640 4420,2450 4447.4,2422.6 U3.4 4482.6,2422.6 4520,2460 4520,2469.09 4548.31,2497.4 U4.4
OD: U2.1 U3.6 U4.6 | length 358.7
  Top Layer w15: U3.6 4465.12,2540 ; U2.1 4465.12,2540 ; U4.6 4581.45,2422.6 4601.04,2442.18 4601.04,2515.22 4586.25,2530 4475.12,2530 4465.12,2540
PA1: SW1.2 U1.11 | length 438.6
  Top Layer w10: U1.11 4898.78,2905.36 4898.78,2870.35 4911.01,2858.12 5167.44,2858.12 SW1.2
PA2: SW1.5 U1.12 | length 929.4
  Top Layer w10: U1.12@4918.27,2905 5079.5,2905 5171.68,2997.18 5287.82,2997.18 5579.94,2705.07 SW1.5 ; U1.12 U1.12@4918.27,2930
PA3: SW1.a U1.13 | length 854.3
  Top Layer w10: U1.13 5065,2956.73 5203.87,3095.6 5560.44,3095.6 SW1.a
PGND: C21.2 C22.1 pad.5 R1.1 R8.1 R10.1 U3.1 U4.1 USB1.7 USB1.A12 USB1.B12 | length 2900.4
  Top Layer w25: C21.2 4245.81,2475.49 4296.79,2475.49 4318.01,2496.71 4354.19,2496.71 U3.1 ; R8.1 4595.31,2599.69 4630.39,2564.61 4630.39,2443.68 4650.79,2423.29 4674.43,2423.29 U4.1 4666.65,2422.6 4619.06,2375
  Top Layer w30: pad.5 4014.35,2510 4054.67,2469.68 ; C21.2 C22.1 4054.67,2469.68 ; USB1.7@5063.08,2384.56 5021.97,2425.66 ; USB1.7@5079.92,2370.2 5350,2370.2 ; USB1.7@5079.92,2519.8 5079.92,2483.61 5046,2449.69 ; R1.1 5317.5,2452.19 5182.5,2452.19 R10.1 5046,2449.69 ; USB1.7@5420.08,2370.2 5350,2370.2 ; USB1.7@5420.08,2519.8 5417.53,2517.26 5417.53,2441.85 5350,2374.31 5350,2370.2 ; 4054.67,2469.68 4149.35,2375 4619.06,2375 4971.31,2375 5021.97,2425.66 ; 5021.97,2425.66 5046,2449.69
  Bottom Layer w30: USB1.7@5079.92,2519.8 USB1.A12 ; USB1.B12 USB1.7@5420.08,2519.8
RES#: *1.14 C17.2 D1.1 R14.1 | length 855
  Top Layer w15: R14.1 v1(4470,2870) 4468.23,2868.23 4468.23,2777.09 D1.1
  Bottom Layer w10: *1.14 4454.88,2520.29 4425.17,2550 4306.22,2550 4280,2576.22 4280,2736.3 4367.27,2823.57 4423.56,2823.57 v1(4470,2870)
RESET: U1.7
SCL: *1.18 R5.2 U1.42 | length 885.4
  Top Layer w10: U1.42 4650.71,3075 4715,3075 4770,3020 v1(4770,2995)
  Bottom Layer w10: R5.2 R5.2@4500.98,2590 ; *1.18 4563.21,2466.9 4563.21,2527.77 R5.2@4500.98,2590 ; v1(4770,2995) 4754,2995 4744,3005 4710.23,3005 4576.94,2871.71 4576.94,2730.9 4535.12,2689.07 4535.12,2624.13 R5.2@4500.98,2590
SDA: *1.19 *1.20 R6.2 U1.43 | length 780.5
  Top Layer w10: U1.43 4650.75,3054.96 4697.77,3054.96 4726.36,3026.37 v1(4726.36,2980)
  Bottom Layer w10: *1.20 *1.19 4592.67,2587.33 R6.2 4589.02,2590 4558.71,2620.31 4558.71,2683.83 4579.88,2705 4613.66,2705 4639.56,2730.9 4639.56,2893.2 v1(4726.36,2980)
SET: U1.26 Y1.12 | length 712
  Top Layer w10: v1(4741.1,3120) 4755,3120 4812.02,3177.02 4886.15,3177.02 4898.39,3189.25 4898.39,3224.25 U1.26
  Bottom Layer w10: Y1.12 4372.52,3072.48 4420.04,3120 v1(4741.1,3120)
SWCLK: (+)SWD.3 U1.37 | length 444.2
  Top Layer w10: U1.37@4660,3175 v1(4660,3205)
  Bottom Layer w10: 4334.88,3420 4549.88,3205 v1(4660,3205)
SWDIO: (+)SWD.2 U1.34 | length 419.8
  Top Layer w10: U1.34 v1(4741.1,3280)
  Bottom Layer w10: 4434.88,3420 4574.88,3280 v1(4741.1,3280)
USART3_RX: R16.1 U1.22 | length 932.5
  Top Layer w10: v1(4830,3075) 4870.71,3075 4929.41,3133.7 4969.25,3133.7 U1.22
  Bottom Layer w10: R16.1 4150.31,3031.49 4225.66,2956.15 4356.27,2956.15 4475.12,3075 v1(4830,3075)
USART3_TX: R15.1 U1.21 | length 922.4
  Top Layer w10: v1(4870.47,3050.24) 4934.25,3114.02 4969.25,3114.02 U1.21
  Bottom Layer w10: R15.1 4162.72,2877.41 4317.41,2877.41 4488.17,3048.17 4868.4,3048.17 v1(4870.47,3050.24)
VDD: C6.2 C7.2 C8.2 C9.2 R7.1 U1.1 U1.24 U1.36 U1.48 | length 1378.8
  Top Layer w10: 4559.53,2956.73 U1.48 ; 4625,3250 4654.84,3250 4701.26,3250 4701.73,3249.53 U1.36
  Top Layer w15: R7.1 4373.48,3088.95 4517.19,3088.95 ; U1.1@4699.74,2905.36 4610.9,2905.36 4559.53,2956.73 4550,2966.26 C6.2 4550,3056.14 4517.19,3088.95 ; U1.24@4970,3175.26 4970,3284.45 4909.76,3344.68 C9.2 C7.2 4719.69,3344.68 4625,3250 4621.82,3250 4553.77,3181.95 4553.77,3143.92 C8.2 4550,3121.76 4517.19,3088.95
VDDA: C12.2 C13.2 CiZhu1.2 U1.9 | length 308.6
  Top Layer w10: U1.9 4859.41,2905.36 4859.41,2870.35 4925.16,2804.61 4926.69,2804.61 C13.2 C13.2@4950,2791.3
  Top Layer w15: C13.2@4950,2791.3 C12.2 CiZhu1.2
pads on no net: *1. *1.7 S.3 S.4 S.5 S.18 S.19 S.20 S.21 SW1. SW1.7 SW1.8 SW1.9 SW1.10 SW1.c SW1.d U1.2 U1.3 U1.4 U1.10 U1.14 U1.15 U1.16 U1.17 U1.18 U1.19 U1.27 U1.28 U1.29 U1.30 U1.31 U1.32 U1.33 U1.38 U1.39 U1.40 U1.41 U1.45 U1.46 U2.4 U3.2 U3.5 U4.2 U4.5 X1.2 X1.4 Y1.1 Y1.2 Y1.3 Y1.4 Y1.5 Y1.6 Y1.7 Y1.8

## Keep-outs
Keep-Out Layer:
  lines w10: 3870,3417.36 3870,2393.74 ccw(c3948.74,2393.74) 3948.74,2315 5917.24,2315 ccw(c5917.24,2393.74) 5995.98,2393.74 5995.98,3417.36 ccw(c5917.24,3417.36) 5917.24,3496.1 3948.74,3496.1

## Other copper
Top Layer:
  pour cut-out: 5137.95,3304.06 4794.16,3304.06 4794.16,2767.54 4800.32,2761.37 5142.28,2761.37
Bottom Layer:
  pour cut-out: 5141.73,3305 4800,3305 4800,2763.43 5141.73,2763.43

## Silkscreen, mask and mechanical layers (free items; w line width, h text height)
Mechanical 1:
  lines w10: 3870,3417.36 cw(c3948.74,3417.36) 3948.74,3496.1

## Text inside footprints (layer, text, board x,y; h text height)
*1: Bottom Overlay "OLED_128X64" at 4395.94,1744.02 h35 r180; Bottom Overlay "30" at 4876.54,2403.52 h35 r180
SW1: Top Overlay "VR2" at 5760.41,2719.53 h35 r180; Top Overlay "VR1" at 5301.91,2898.47 h35 r270
Y1: Bottom Overlay "JDY-40" at 4739,2952.43 h35 r270